# Altium PCB PCB1.PcbDoc
Units mm, origin at the board's own origin, x right, y up, seen from the top; angles counter-clockwise.
Board outline 99 x 26 mm, 2 copper layers (Top Layer, Bottom Layer); 54 components, 25 nets, 153 pads, 38 vias.
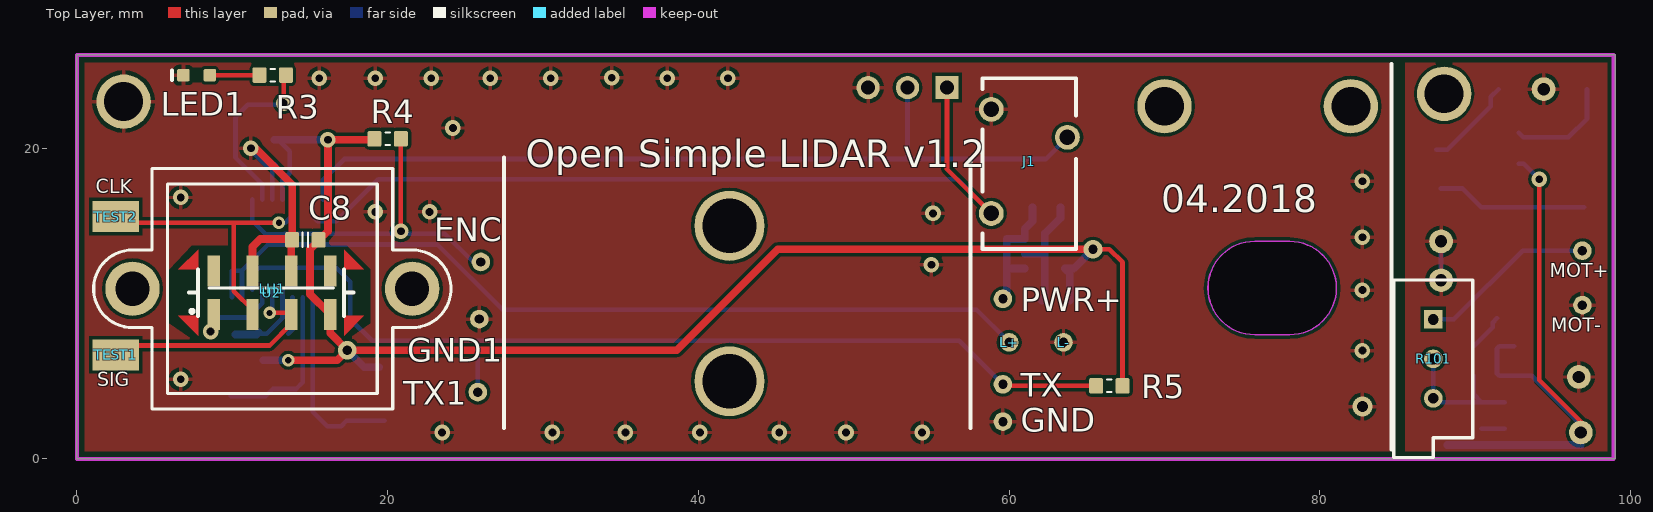
[diagram p0: Top Layer view]
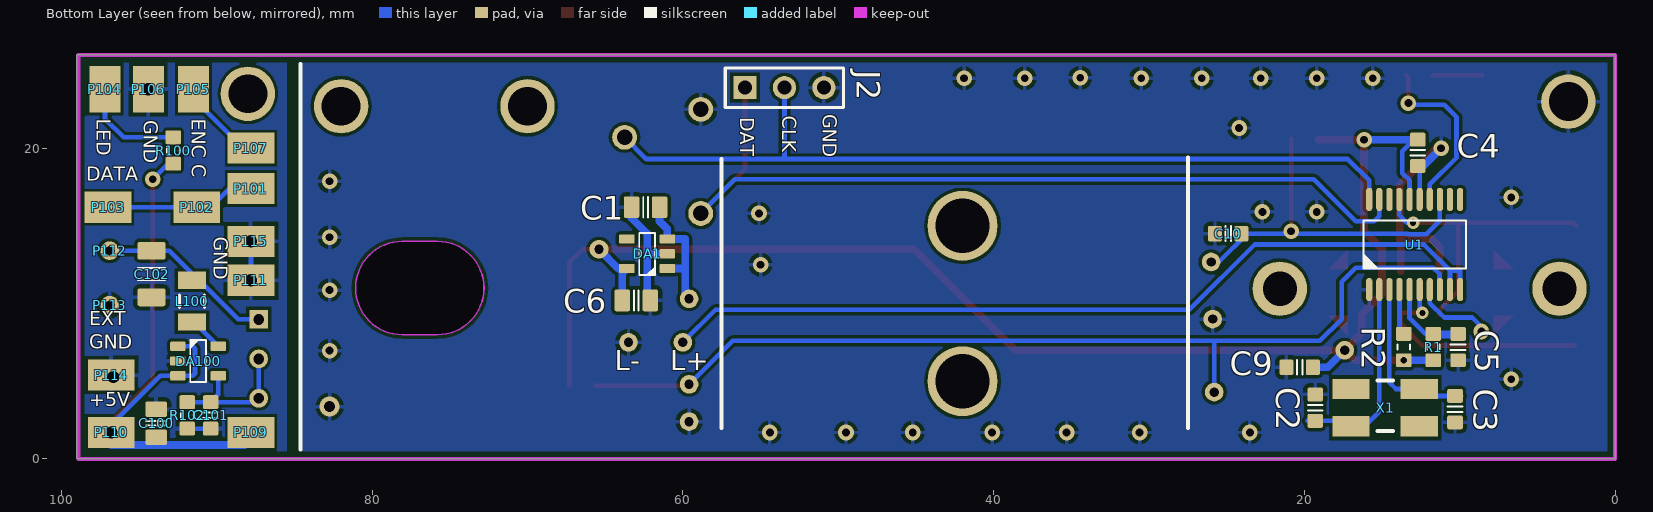
[diagram p1: Bottom Layer view, seen from below]
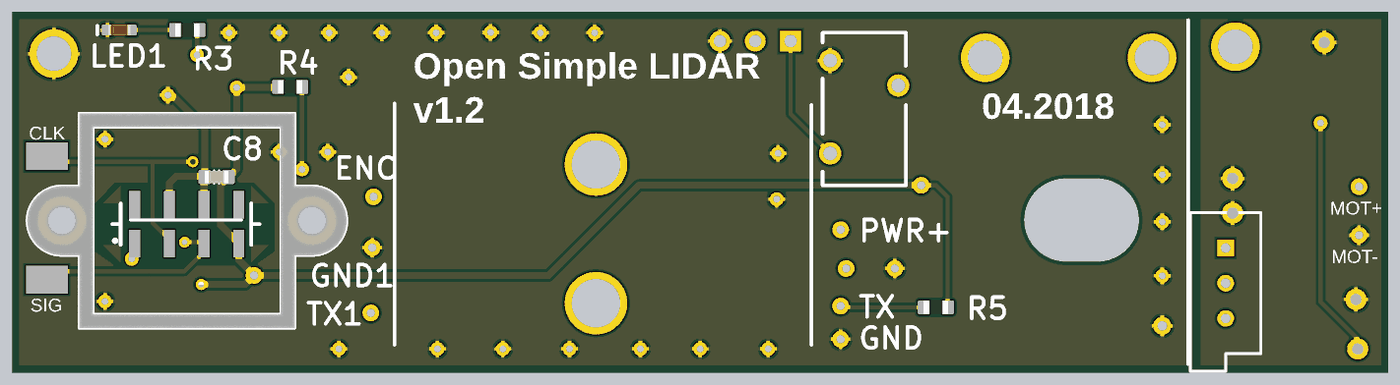
[diagram p2: 3D render of the assembled board from above, using the file's embedded part models]
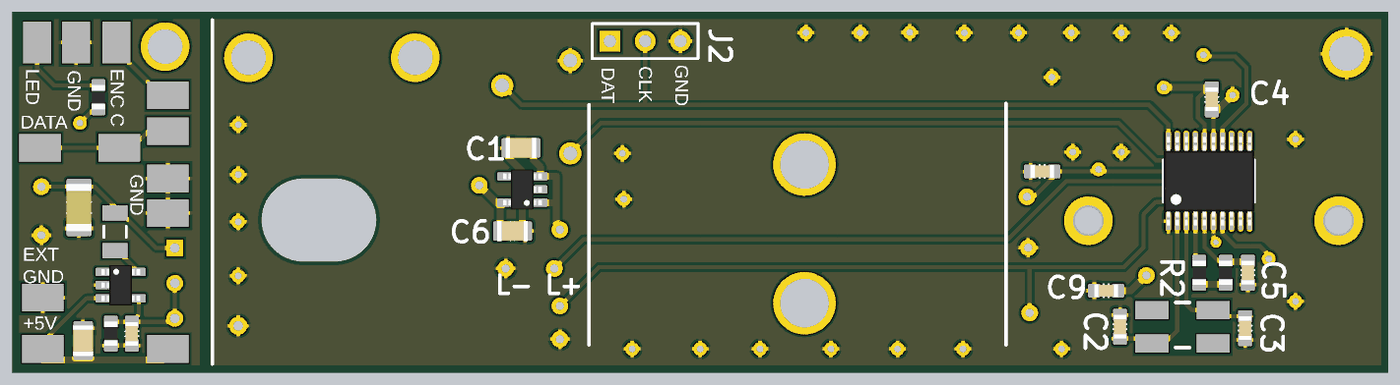
[diagram p3: 3D render of the assembled board from below, using the file's embedded part models]

## Layer stack, top to bottom
Top Solder: solder mask 0.0102, Solder Resist, Dk 3.5
Top Layer: signal copper 0.0356
Dielectric 1: dielectric 0.32, FR-4, Dk 4.8
Bottom Layer: signal copper 0.0356
Bottom Solder: solder mask 0.0102, Solder Resist, Dk 3.5

## Board outline
0,0 0,26 99,26 99,0
cut-out: 75.8,8 cw(c75.8,11) 75.8,14 78.066,14 78.066,13.995 cw(c78.066,10.995) 78.066,7.995 78.066,8.005

## Design rules (kind name [scope] priority, off if disabled: settings)
Clearance [All] p1: gap=0.2
HoleSize [All] p1: absolutevalues=TRUE maxlimit=6 minlimit=0.3 maxpercent=80.000 minpercent=20.000
PolygonConnect [All] p1: connectstyle=Relief reliefconductorwidth=0.254 reliefentries=4 polygonreliefangle="90 Angle" airgapwidth=0.254
RoomDefinition motor_sch [InComponentClass('motor_sch')] p1: confinementstyle=ConfineIn formatcopy=TRUE lockcomponents=FALSE outline -71.9,-168.9 -21.1,-168.9 -21.1,-143.5 -71.9,-143.5
RoomDefinition lidar4_sch [InComponentClass('lidar4_sch')] p2: confinementstyle=ConfineIn formatcopy=TRUE lockcomponents=FALSE outline -71.9,-168.9 -21.1,-168.9 -21.1,-143.5 -71.9,-143.5
RoutingVias [All] p1: holewidth=0.5 width=1 viastyle="Through Hole" minholewidth=0.4 minwidth=0.8 maxholewidth=2 maxwidth=3
SolderMaskExpansion [All] p1: expansion=0.102
Width [All] p1: maxlimit=1 minlimit=0.2 preferedwidth=0.3
29 further rules are at their usual default settings.

## Classes and differential pairs
component class motor_sch: C100 C101 C102 DA100 L100 P5 P101 P102 P103 P104 P105 P106 P107 P109 P110 P111 P112 P113 P114 P115 R100 R101 R102
component class lidar4_sch: C1 C2 C3 C4 C5 C6 C8 C9 C10 DA1 ENC GND GND1 J1 J2 L+ L- LED1 LH1 pwr+ R1 R2 R3 R4 R5 TEST1 TEST2 TX TX1 U1 U2 X1

## Components (designator, comment, footprint, x,y, rotation, side; value= is the part's Value field where it differs from the comment)
C1 "4.7uF" CAPC2012X135N 62.4,16.2 r180 bottom
C2 "10pF" CAPC1608X90N 19.3,3.3 r270 bottom
C3 "10pF" CAPC1608X90N 10.3,3.2 r90 bottom
C4 "100nF" CAPC1608X90N 12.7,19.7 r90 bottom
C5 "100nF" CAPC1608X90N 10.1,7.2 r90 bottom
C6 "4.7uF" CAPC2012X135N 63,10.2 r0 bottom
C8 "100nF" CAPC1608X90N 14.7,14.1 r0 top
C9 "100nF" CAPC1608X90N 20.3,5.9 r180 bottom
C10 "1nF" CAPC1608X90N 24.9,14.5 r180 bottom
C100 "4.7uF" CAPC2012X135N 93.9,2.3 r270 bottom
C101 "100pF" CAPC1608X90N 90.4,2.8 r90 bottom
C102 "10uF" CAPC3216X100N 94.2,11.9 r90 bottom
DA1 "TPS76333" SOT23-5 62.3,13.2 r0 bottom
DA100 "TPS62200DBVT" SOT23-5 91.2,6.3 r180 bottom
ENC "ENCODER" Ext_hole#1 26,12.675 r90 top
GND "POWER-" Ext_hole#1 59.6,2.4 r90 top (schematic designator P6)
GND1 "POWER-" Ext_hole#1 25.9,9 r90 top
J1 "AUB-13" AUB-13 58.3,13.5 r0 top
J2 "SWD" HDR1X3 56,23.9 r180 bottom
L100 "Inductor" INDC3216 91.6,10.15 r90 bottom
L+ "LASER+" Ext_hole#1 60,7.5 r0 top (schematic designator P3)
L- "LASER-" Ext_hole#1 63.5,7.5 r0 top (schematic designator P4)
LED1 "LED" LED_0603 7.7,24.7 r180 top
LH1 "Lens Holder" LENS_HOLDER_2 20.325,18.7 r180 top locked
P101 "DATA" Ext_pad 89.3,17.4 r90 bottom
P102 "DATA" Ext_pad 92.8,16.2 r90 bottom
P103 "DATA" Ext_pad 95.5,16.2 r270 bottom
P104 "ENC_LED" Ext_pad 97.2,25.3 r180 bottom
P105 "ENC_C" Ext_pad 91.5,25.3 r180 bottom
P106 "ENC_GND" Ext_pad 94.4,25.3 r180 bottom
P107 "ENCODER" Ext_pad 86.3,20 r270 bottom
P109 "5V" Ext_pad 86.3,1.7 r270 bottom
P110 "EXT_5V" Ext_pad 95.3,1.7 r270 bottom
P111 "EXT_GND" Ext_pad 86.3,11.5 r270 bottom
P112 "Motor+" Ext_hole#1 96.9,13.4 r90 bottom
P113 "Motor-" Ext_hole#1 96.9,9.9 r90 bottom
P114 "GND" Ext_pad 95.3,5.4 r270 bottom
P115 "GND" Ext_pad 86.3,14 r270 bottom
PWR+ "POWER+" Ext_hole#2 59.8,10.3 r90 top (schematic designator P5)
R1 "100" RESC1608X55N 11.7,7.2 r90 bottom
R2 "10K" RESC1608X55N 13.6,7.2 r90 bottom
R3 "330" RESC1608X55N 12.6,24.7 r0 top
R4 "47K" RESC1608X55N 20,20.6 r0 top
R5 "10K" RESC1608X55N 66.45,4.7 r180 top
R100 "240 (Adj)" RESC1608X55N 92.8,19.85 r270 bottom
R101 "RPot" VR5 87.3,6.44 r270 top
R102 "1K" RESC1608X55N 91.9,2.8 r90 bottom
TEST1 "Pad" Ext_pad 1,6.7 r90 top
TEST2 "Pad" Ext_pad 1,15.6 r90 top
TX "TX" Ext_hole#1 59.6,4.8 r90 top (schematic designator P1)
TX1 "TX" Ext_hole#1 25.8,4.3 r90 top
U1 "STM32F030F4P6" TSSOP65P640X120-20N 12.9,13.8 r90 bottom locked
U2 "TSL1401CL" TSL1401CL_2 12.5,10.7 r0 top locked
X1 "Quartz" "SX-6 QUARTZ" 14.8,3.3 r180 bottom

## Footprints (in the part's own frame and the unit in brackets; to place one, negate y for a bottom-side part, rotate by r counter-clockwise, add the part's x,y. Pads: shape width x height; smd on the part's side, far side on the other; paste and mask are expansions set on the pad)
AUB-13 [mm] "3.5 Jack connector"
  round 1.6 hole 1: 1(0.55,2.3) 3(5.45,7.2) 5(0.55,9)
  silkscreen extent 0,0 6,11, body extent 0,0 6,14, height 6
CAPC1608X90N [mm] "Chip Capacitor, Body 1.6x0.8mm, EIA 0603, IPC Medium Density"
  round 0.254 on Mech15: 0(0,0)
  rrect25% 0.9x1 smd: 1(-0.85,0) 2(0.85,0)
  Top Layer pour cut-out: -0.6,0.5 -0.4,0.7 0.4,0.7 0.6,0.5 0.6,-0.5 0.4,-0.7 -0.4,-0.7 -0.6,-0.5
  silkscreen extent -0.18,-0.48 0.18,0.48, body extent -0.85,-0.45 0.85,0.45, height 0.89
CAPC2012X135N [mm] "Chip Capacitor, Body 2.0x1.2mm, EIA 0805, IPC Medium Density"
  round 0.254 on Mech15: 0(0,0)
  rrect25% 1x1.4 smd: 1(-0.9,0) 2(0.9,0)
  Top Layer pour cut-out: -0.675,0.7 -0.475,0.9 0.475,0.9 0.675,0.7 0.675,-0.7 0.475,-0.9 -0.475,-0.9 -0.675,-0.7
  silkscreen extent -0.15,-0.65 0.15,0.65, body extent -1.1,-0.72 1.1,0.73, height 1.34
CAPC3216X100N [mm] "Chip Capacitor, Body 3.2x1.6mm, 1.0mm H, EIA 1206, IPC Medium Density"
  round 0.508 on Mech15: 0(0,0)
  rrect25% 1.15x1.8 smd: 1(-1.5,0) 2(1.5,0)
  silkscreen extent -0.4,-0.88 0.4,0.88, body extent -1.7,-0.9 1.7,0.9, height 1
Ext_hole#1 [mm] "Hole for wire (0.6)"
  round 1.2 hole 0.6: 1(0,0)
Ext_hole#2 [mm] "Hole for wire (0.6)"
  round 1.2 hole 0.6: 1(0,0.2)
Ext_pad [mm] "Pad for wire(3x2)"
  rect 2x3 smd: 1(0,-1.5)
HDR1X3 [mm] "Connector; Header; 3 Position"
  rect 1.5x1.5 hole 0.9: 1(0,0)
  round 1.5 hole 0.9: 2(2.54,0) 3(5.08,0)
  silkscreen extent -1.27,-1.27 6.35,1.27
INDC3216 [mm] "Chip Inductor, Body 3.2x1.6mm, IPC High Density"
  rect 1.1x1.8 smd: 1(-1.35,0) 2(1.35,0)
  silkscreen extent -0.4,-0.8 0.4,0.8, body extent -1.7,-0.9 1.7,0.9, height 0.55
LED_0603 [mm] "LED_0603"
  round 0.254 on Mech15: 0(0,0)
  rrect25% 0.8x0.8 smd: 1(-0.85,0) 2(0.85,0)
  Top Layer pour cut-out: -0.5,0.5 0.5,0.5 0.5,-0.5 -0.5,-0.5
  silkscreen extent 1.58,-0.3 1.58,0.33, body extent -0.8,-0.4 0.8,0.4, height 0.75
LENS_HOLDER_2 [mm] "Holder for M12 lens"
  round 3.5 hole 2.2: M2(-1.25,7.75) M2(16.75,7.75)
  silkscreen extent -3.75,0 19.25,15.5, body extent -3.75,0 19.25,15.5, height 10
RESC1608X55N [mm] "Chip Resistor, Body 1.6x0.8mm, EIA 0603, IPC Medium Density"
  round 0.254 on Mech15: 0(0,0)
  rrect25% 0.9x1 smd: 1(-0.85,0) 2(0.85,0)
  Top Layer pour cut-out: -0.6,0.5 -0.4,0.7 0.4,0.7 0.6,0.5 0.6,-0.5 0.4,-0.7 -0.4,-0.7 -0.6,-0.5
  silkscreen extent -0.15,-0.41 0.15,0.41, body extent -0.87,-0.47 0.88,0.48, height 0.54
SOT23-5 [mm]
  round 0.5 on Mech15: 0(0,0)
  rrect25% 1x0.6 smd: 1(-1.3,0.95) 2(-1.3,0) 3(-1.3,-0.95) 4(1.3,-0.95) 5(1.3,0.95)
  silkscreen extent -0.51,-1.35 0.51,1.35, body extent -1.4,-1.45 1.4,1.45, height 1.44
"SX-6 QUARTZ" [mm] "Quartz_SX-6 (SMD06035C4)"
  rect 2.4x1.3 smd: 1(-2.2,-1.2) 2(2.2,-1.2) 3(2.2,1.2) 4(-2.2,1.2)
  Top Layer pour cut-out: -3.594,1.3 -3.594,1.994 -3.594,2.094 3.6,2.094 3.6,0.3 3.6,-2.1 3.1,-2.1 1.9,-2.1 -3.594,-2.1 -3.594,-2
  silkscreen extent -0.5,-1.5 0.5,1.75, body extent -3,-1.75 3,1.75, height 1.2
TSL1401CL_2 [mm] "Light Sensor"
  rect 0.8x2 smd: 1(-3.7,-1.4) 2(-1.2,-1.4) 3(1.3,-1.4) 4(3.8,-1.4) 5(3.8,1.4) 6(1.3,1.4) 7(-1.2,1.4) 8(-3.7,1.4)
  Top Layer pour cut-out: 4.867,3.008 6.368,1.507 6.368,-1.982 4.9,-3 -5.1,-3 -6.568,-1.982 -6.568,1.476 -5.1,3.008
  Top Layer region: -4.7,-1.5 -4.7,-2.77 -5.97,-1.5
  Top Layer region: 4.7,-1.5 4.7,-2.77 5.97,-1.5
  Top Layer region: -4.7,1.5 -4.7,2.77 -5.97,1.5
  Top Layer region: 4.7,1.5 4.7,2.77 5.97,1.5
  silkscreen extent -5.3,-1.5 5.3,1.5, body extent -4.7,-1.5 4.7,1.5, height 1.5
TSSOP65P640X120-20N [mm] "TSSOP, 20-Leads, Body 6.6x4.5mm (max), Pitch 0.65mm, IPC Medium Density"
  round 0.508 on Mech15 mask+0.127: 0(0,0)
  oval 1.5x0.4 smd paste-1 mask+0.127: 1(-2.9,2.925) 2(-2.9,2.275) 3(-2.9,1.625) 4(-2.9,0.975) 5(-2.9,0.325) 6(-2.9,-0.325) 7(-2.9,-0.975) 8(-2.9,-1.625) 9(-2.9,-2.275) 10(-2.9,-2.925) 11(2.9,-2.925) 12(2.9,-2.275) 13(2.9,-1.625) 14(2.9,-0.975) 15(2.9,-0.325) 16(2.9,0.325) 17(2.9,0.975) 18(2.9,1.625) 19(2.9,2.275) 20(2.9,2.925)
  silkscreen extent -1.55,-3.3 1.55,3.3, body extent -3.2,-3.25 3.2,3.25, height 1.2
VR5 [mm] "Thru-Hole; 3 Leads"
  rect 1.2x1.2 hole 0.7: 1(-2.54,0)
  round 1.2 hole 0.7: 2(0,0) 3(2.54,0)
  silkscreen extent -5.08,-2.54 6.35,2.54

## Part data
C1 C2 C3 C4 C5 C6 C8 C9 C10 C100 C101 C102: library part CC0805, "Chip capacitor"
DA1: "LDO"
DA100: library part TPS62200, "DC-DC step-down"
ENC GND GND1 L+ L- P101 P102 P103 P104 P105 P106 P107 P109 P110 P111 P114 P115 PWR+ TEST1 TEST2 TX TX1: library part "Ext Pad", "Pad for wire"
J1: library part Phonejack3, "Jack Socket, 1/4\" [6.5mm], Thru-Hole, Vertical, 3-Conductor Open Circuit (Non-Normalling)"
J2: library part "Header 3", "Header, 3-Pin"
LED1: library part LED_0603, "LED_0603"
LH1: library part "M12 Lens Holder", "M12 Lens Holder"
P112 P113: library part "Hole Pad", "Hole Pad"
R1 R2 R3 R4 R5 R100 R102: library part RC0805, "Chip resistor"
R101: "Potentiometer"
U1: "Value-line ARM-based 32-bit MCU with 16 to 64-KB Flash, timers,  ADC, communication interfaces, 2.4-3.6 V operation"
U2: "Light sensor"
X1: library part Quartz_SX-6, "Quartz_SX-6 (SMD06035C4)"

## Free pads (board coordinates)
  round 3.5 hole 2.5: 0(3,23) 0(70,22.7) 0(82,22.7) 0(88,23.5)
  round 4.5 hole 3.5: 0(42,5) 0(42,15)
  round 1.524 hole 0.8: 2(87.8,11.5) 2(87.8,14) 2(94.4,23.8) 2(96.673,5.273) 3(96.8,1.7)

## Via types
v1: diameter 1, hole 0.5, Top Layer to Bottom Layer, 32 vias
v2: diameter 0.8, hole 0.4, Top Layer to Bottom Layer, 3 vias
v3: diameter 1.2, hole 0.6, Top Layer to Bottom Layer, 2 vias
v4: diameter 1.3, hole 0.7, Top Layer to Bottom Layer, 1 vias

## Nets (pads, with @x,y where several pads share a name; then routed paths per layer and width w, separated by ;. In a path a pad name is that pad's centre, name@x,y a point inside that pad or via, vN(x,y) a via of type N, cw(c..) or ccw(c..) an arc to the next point about the centre after c; other vN are vias at no path point)
+3.3V: C4.2 C6.2 C8.2 C9.2 DA1.5 R1.1 R2.1 R4.1 R5.1 U1.16 U2.4 | length 99.3
  Top Layer w0.3: v3(65.4,13.5) 66.45,13.5 67.3,12.65 R5.1
  Top Layer w0.5: v2(13.6,6.35) 16.75,6.35 v3(17.4,7) ; R4.1@19.1,20.55 v1(16.15,20.55) 16.15,14.65 15,13.5 15,10.6 U2.4 16.3,8.1 v3(17.4,7) ; v3(65.4,13.5) 45.1,13.5 38.6,7 v3(17.4,7)
  Bottom Layer w0.3: C4.2@12.95,20.55 13.7,19.8 13.7,18.4 13.225,17.925 U1.16
  Bottom Layer w0.5: R1.1@12,6.35 v2(13.6,6.35) ; C4.2 12.95,20.55 15.45,20.55 v1(16.15,20.55) ; v3(17.4,7) 18.5,5.9 C9.2 ; C6.2 63.9,11.95 DA1.5 64.15,12.25 v3(65.4,13.5)
+5V: C100.2 DA100.1 DA100.3 P109.1 P110.1 pad.3 R100.2 | length 37.8
  Top Layer w0.3: v1(94.128,17.997) 94.128,5.078 96.8,2.406 pad.3
  Bottom Layer w0.3: DA100.1 91.55,7.25 91.4,7.1 91.4,5.5 91.55,5.35 DA100.3 93.65,5.35 96.8,2.2 pad.3 ; R100.2 93.125,19 v1(94.128,17.997)
  Bottom Layer w0.5: P109.1@88.2,0.9 P110.1@96.8,0.9
+PWR: C1.2 DA1.1 DA1.3 PWR+.1 | length 8.5
  Bottom Layer w0.5: PWR+.1 59.85,10.55 59.85,12.25 ; DA1.1 59.85,12.25 ; C1.2 61.5,15.3 61,14.8 DA1.3 59.85,14.15 59.85,12.25
AVDD: C5.2 R1.2 U1.5 | length 5.3
  Bottom Layer w0.3: R1.2 12.221,8.05 13.225,9.054 U1.5
  Bottom Layer w0.5: C5.2@10.2,8 11.55,8 R1.2@11.7,8.15
CLK: TEST2.1 U1.17 U2.2 | length 19.1
  Top Layer w0.3: TEST2.1@2.5,15 2.7,15.2 v2(13,15.2) ; 10.1,15.2 10.1,10.8 11.3,9.6 U2.2
  Bottom Layer w0.3: v2(13,15.2) 13.4,15.2 13.9,15.7 U1.17@13.9,16.675
DATA: P101.1 P102.1 P103.1 | length 9.7
  Bottom Layer w0.3: P101.1 89.2,17.4 90.4,16.2 P102.1 P103.1
ENC: C10.2 ENC.1 R4.2 U1.13 | length 23.2
  Top Layer w0.3: v1(20.85,14.65) R4.2
  Bottom Layer w0.3: U1.13 11.275,15.325 12.15,14.45 13.311,14.45 13.361,14.5 v1@20.85,14.5 ; v1(20.85,14.65) v1@20.9,14.6 ; v1@20.9,14.5 23.675,14.5 25.5,12.675 ENC.1
ENCODER: P105.1 P107.1 | length 6
  Bottom Layer w0.3: P107.1@87.5,19.9 88.2,19.9 91,22.7 91,23.3 P105.1
GND: C1.1 C2.1 C3.1 C4.1 C5.1 C6.1 C8.1 C9.1 C10.1 DA1.2 GND1.1 GND.1 J1.5 J2.3 L-.1 LED1.2 pad.0@3,23 U1.1 U1.15 U2.6 U2.7 | length 25.7
  Top Layer w0.5: v1(11.2,20) 11.5,20 13.85,17.65 C8.1 ; U2.7 11.3,13.65 11.8,14.15 13.8,14.15 U2.6
  Bottom Layer w0.3: U1.15 12.575,18.725 C4.1
  Bottom Layer w0.5: v1(11.2,20) 12.35,18.85 C4.1 ; J1.5 J1.5@59.05,22.7 ; DA1.2 62.3,13.2 ; C6.1 62.3,10.4 62.3,13.2 ; C1.1 63.3,15.5 62.3,14.5 62.3,13.2
  other v1: 23.5,1.7 30.6,1.7 35.3,1.7 40.1,1.7 45.2,1.7 49.5,1.7 54.4,1.7 6.673,5.127 82.738,6.97 82.738,10.87 55,12.5 82.738,14.27 55.1,15.8 19.2,15.9 22.7,15.9 6.673,16.827 82.738,17.87 24.2,21.3 15.6,24.5 19.2,24.5 22.8,24.5 26.6,24.5 30.5,24.5 38,24.5 41.9,24.5 34.427,24.527
  other v4: 82.738,3.37
GNDM: C100.1 C101.1 C102.1 DA100.2 P106.1 P111.1 P113.1 P114.1 P115.1 pad.2 R102.1 | length 4
  Bottom Layer w0.3: P111.1 P115.1 ; C101.1 R102.1
LASER: L+.1 U1.9 U1.10 | length 56.8
  Bottom Layer w0.3: U1.10@9.975,10.4 U1.10 9.975,12.1 10.625,12.1 U1.9 U1.9@10.625,10.4 ; 10.6,12.1 12.3,13.8 23.2,13.8 27.4,9.6 57.9,9.6 L+.1
MOT+: C102.2 L100.2 P112.1 R101.1 | length 11.4
  Bottom Layer w0.3: R101.1 88.63,8.98 93.05,13.4 C102.2 P112.1
NetC101_2: C101.2 DA100.4 R101.2 R101.3 R102.2 | length 9.2
  Bottom Layer w0.3: R101.2 R101.3 87.55,3.65 C101.2 ; DA100.4 89.9,4.15 C101.2 ; R102.2 C101.2
NetDA100_5: DA100.5 L100.1 | length 2.4
  Bottom Layer w0.3: DA100.5 91.125,8.475 91.125,8.775 L100.1@91.4,9.05
NetLED1_1: LED1.1 R3.1 | length 3.2
  Top Layer w0.3: LED1.1 R3.1
NetP104_1: P104.1 R100.1 | length 6.9
  Bottom Layer w0.3: R100.1@92.8,21 93.1,20.7 96,20.7 97.2,21.9 P104.1
NetR3_2: R3.2 U1.14 | length 11.3
  Top Layer w0.3: v1(13.3,22.9) 13.3,24.55 R3.2
  Bottom Layer w0.3: U1.14 11.925,17.675 10.2,19.4 10.2,22 11,22.8 v1@13.3,22.8
NRST: R2.2 U1.4 | length 2.5
  Bottom Layer w0.3: R2.2 13.875,8.325 U1.4@13.875,10.4
OSC1: C2.2 U1.2 X1.1 | length 12.5
  Bottom Layer w0.3: U1.2@15.175,10.4 15.175,3.025 16.1,2.1 X1.1 17.35,2.45 C2.2@19.8,2.45
OSC2: C3.2 U1.3 X1.3 | length 10.5
  Bottom Layer w0.3: C3.2@9.9,4.05 12.15,4.05 X1.3 14.1,4.5 14.525,4.925 U1.3@14.525,10.4
SI: U1.7 U2.1 | length 5.6
  Bottom Layer w0.3: v1(8.6,8.2) 8.3,8.2 9.2,9.1 11,9.1 11.925,10.025 U1.7
SIGNAL: TEST1.1 U1.6 U2.3 | length 15.4
  Top Layer w0.3: TEST1.1@2.6,7.3 12.4,7.3 13.8,8.7 U2.3 13.7,9.4 v2(12.4,9.4)
  Bottom Layer w0.3: v2(12.4,9.4) 12.575,9.575 U1.6
SWCLK: J1.3 J2.2 U1.20 | length 55.2
  Bottom Layer w0.3: U1.20 15.825,17.925 17.2,19.3 62.35,19.3 J1.3 ; 53.46,19.34 J2.2
  Bottom Layer w0.5: J1.3@63.525,20.925 J1.3
SWDIO: J1.1 J2.1 U1.19 | length 56.2
  Top Layer w0.3: J2.1 56,18.65 J1.1
  Bottom Layer w0.3: U1.19 15.175,15.625 15.5,15.3 16.7,15.3 19.4,18 56.65,18 J1.1
TX: R5.2 TX1.1 TX.1 U1.8 | length 63.3
  Top Layer w0.3: TX.1 59.7,4.7 R5.2
  Bottom Layer w0.3: U1.8 11.3,10.925 11.3,11.9 11.7,12.3 16.7,12.3 17.6,11.4 17.6,9 19,7.6 25.8,7.6 ; TX1.1 25.8,7.6 ; TX.1 56.8,7.6 25.8,7.6
pads on no net: C1.0 C2.0 C3.0 C4.0 C5.0 C6.0 C8.0 C9.0 C10.0 C100.0 C101.0 C102.0 DA1.0 DA1.4 DA100.0 LED1.0 LH1.M2 R1.0 R2.0 R3.0 R4.0 R5.0 R100.0 R102.0 U1.0 U1.11 U1.12 U1.18 U2.5 U2.8 X1.2 X1.4

## Polygon pours and split planes (outlines as drawn)
GNDM on Top Layer "GNDM_TOP" (solid, pour order 6): 98.5,25.5 98.5,0.5 85.5,0.5 85.5,25.5
GND on Top Layer "Top Layer-No Net" (solid, pour order 0): 0.5,25.5 0.5,0.5 83,0.5 84.5,0.5 84.5,1 84.5,1.6 84.5,25.5
GNDM on Bottom Layer "GNDM_TOP" (solid, pour order 4): 85.5,25.5 85.5,0.5 98.5,0.5 98.5,25.5
GND on Bottom Layer "Top Layer-No Net" (solid, pour order 2): 0.5,25.5 84.5,25.5 84.5,0.5 83.5,0.5 0.5,0.5

## Keep-outs
Keep-Out Layer:
  lines w0.1: 75.8,8 cw(c75.8,11) 75.8,14 78.066,14 ; 75.8,8.005 78.066,8.005 ; 78.066,7.995 ccw(c78.066,10.995) 78.066,13.995
  lines w0.254: 0,0 98.9,0 98.9,26 0,26 0,0

## Silkscreen, mask and mechanical layers (free items; w line width, h text height)
Top Overlay:
  lines w0.254: 27.5,2 27.5,19.4 ; 57.5,2 57.5,19.3 ; 84.6,0.611 84.6,25.414
  text "Open Simple LIDAR v1.2" at 28.9,18.2 h3
  text "CLK" at 1.2,16.8 h1.52
  text "04.2018" at 69.8,15.3 h3
  text "MOT+" at 94.8,11.4 h1.52
  text "MOT-" at 94.9,7.9 h1.52
  text "SIG" at 1.3,4.4 h1.52
Bottom Overlay:
  lines w0.254: 27.5,2 27.5,19.4 ; 57.5,2 57.5,19.3 ; 84.6,0.611 84.6,25.414
  text "GND" at 51.3,22.2 h1.52 r90
  text "CLK" at 53.9,22.1 h1.52 r90
  text "DAT" at 56.6,22 h1.52 r90
  text "ENC C" at 91.9,21.9 h1.52 r90
  text "LED" at 98,21.9 h1.52 r90
  text "GND" at 95,21.8 h1.52 r90
  text "DATA" at 98.4,17.6 h1.52
  text "GND" at 90.5,14.3 h1.52 r90
  text "EXT / GND" at 98.2,6.8 h1.52
  text "+5V" at 98.2,3.1 h1.52
Mechanical 1:
  lines w0.3: 75.8,8 cw(c75.8,11) 75.8,14 78.066,14 ; 75.8,8.005 78.066,8.005 ; 78.066,7.995 ccw(c78.066,10.995) 78.066,13.995